# Altium PCB Fingerprint_Mechanism_PCB_V1.2.PcbDoc
Units mil, origin at the board's own origin, x right, y up, seen from the top; angles counter-clockwise.
Board outline 1800 x 4000 mil, 2 copper layers (Top Layer, Bottom Layer); 32 components, 20 nets, 114 pads, 0 vias.
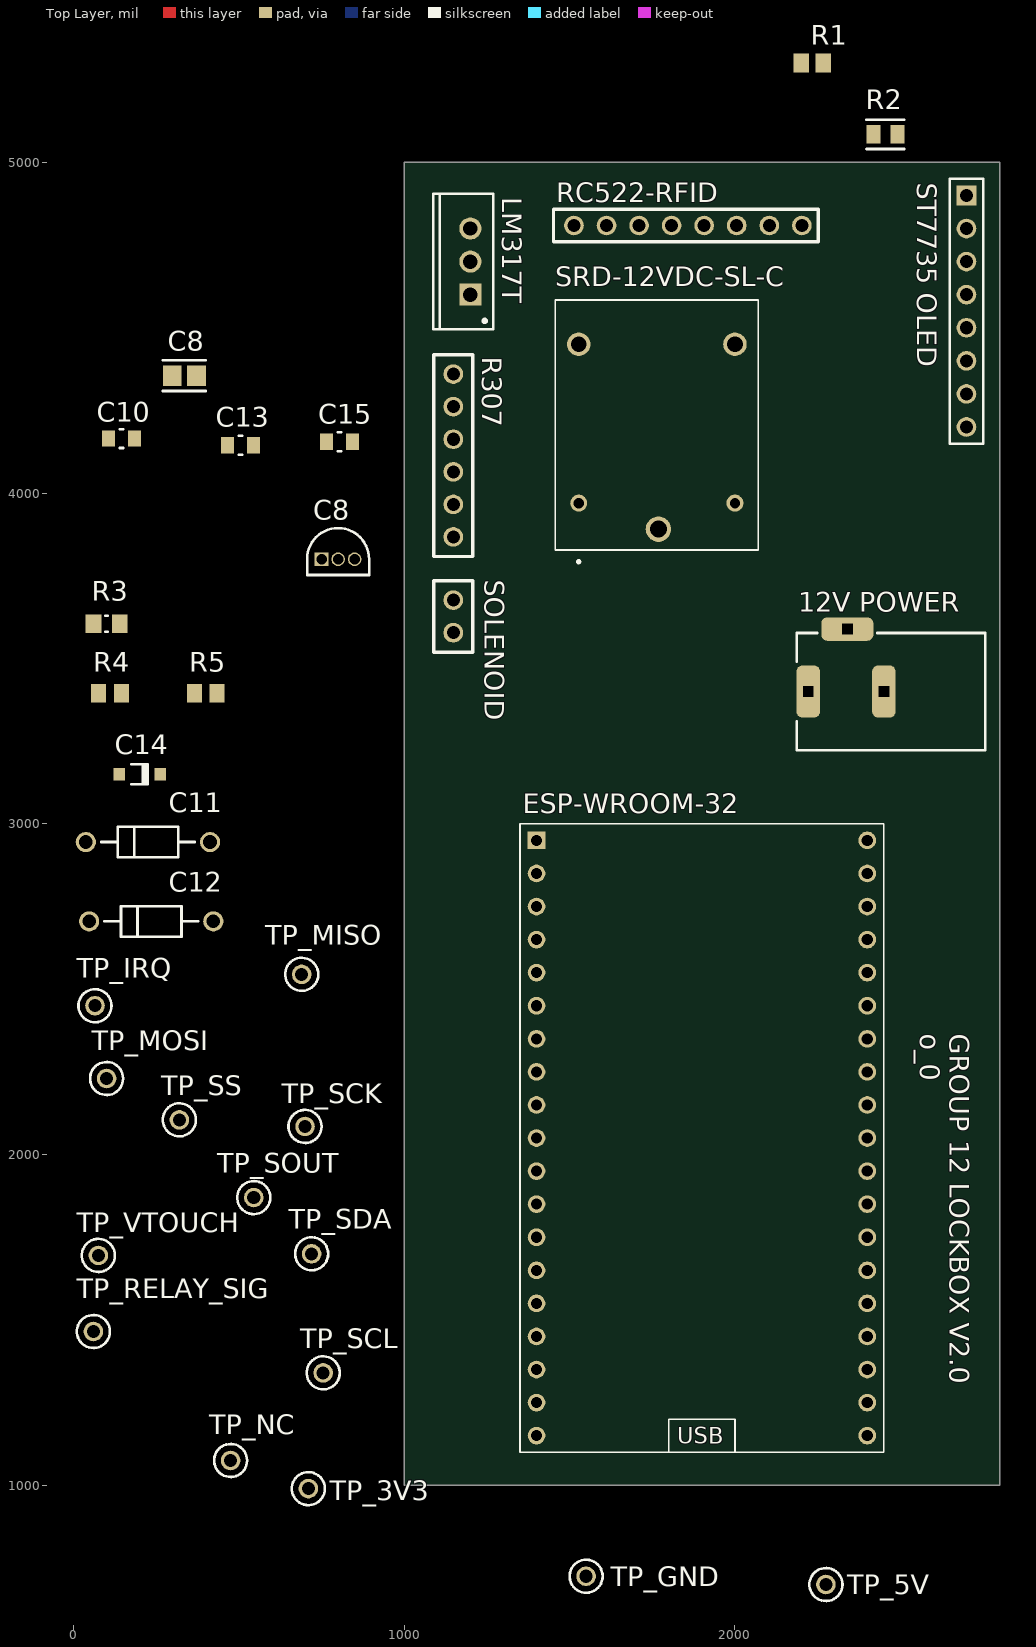
[diagram p0: Top Layer view]
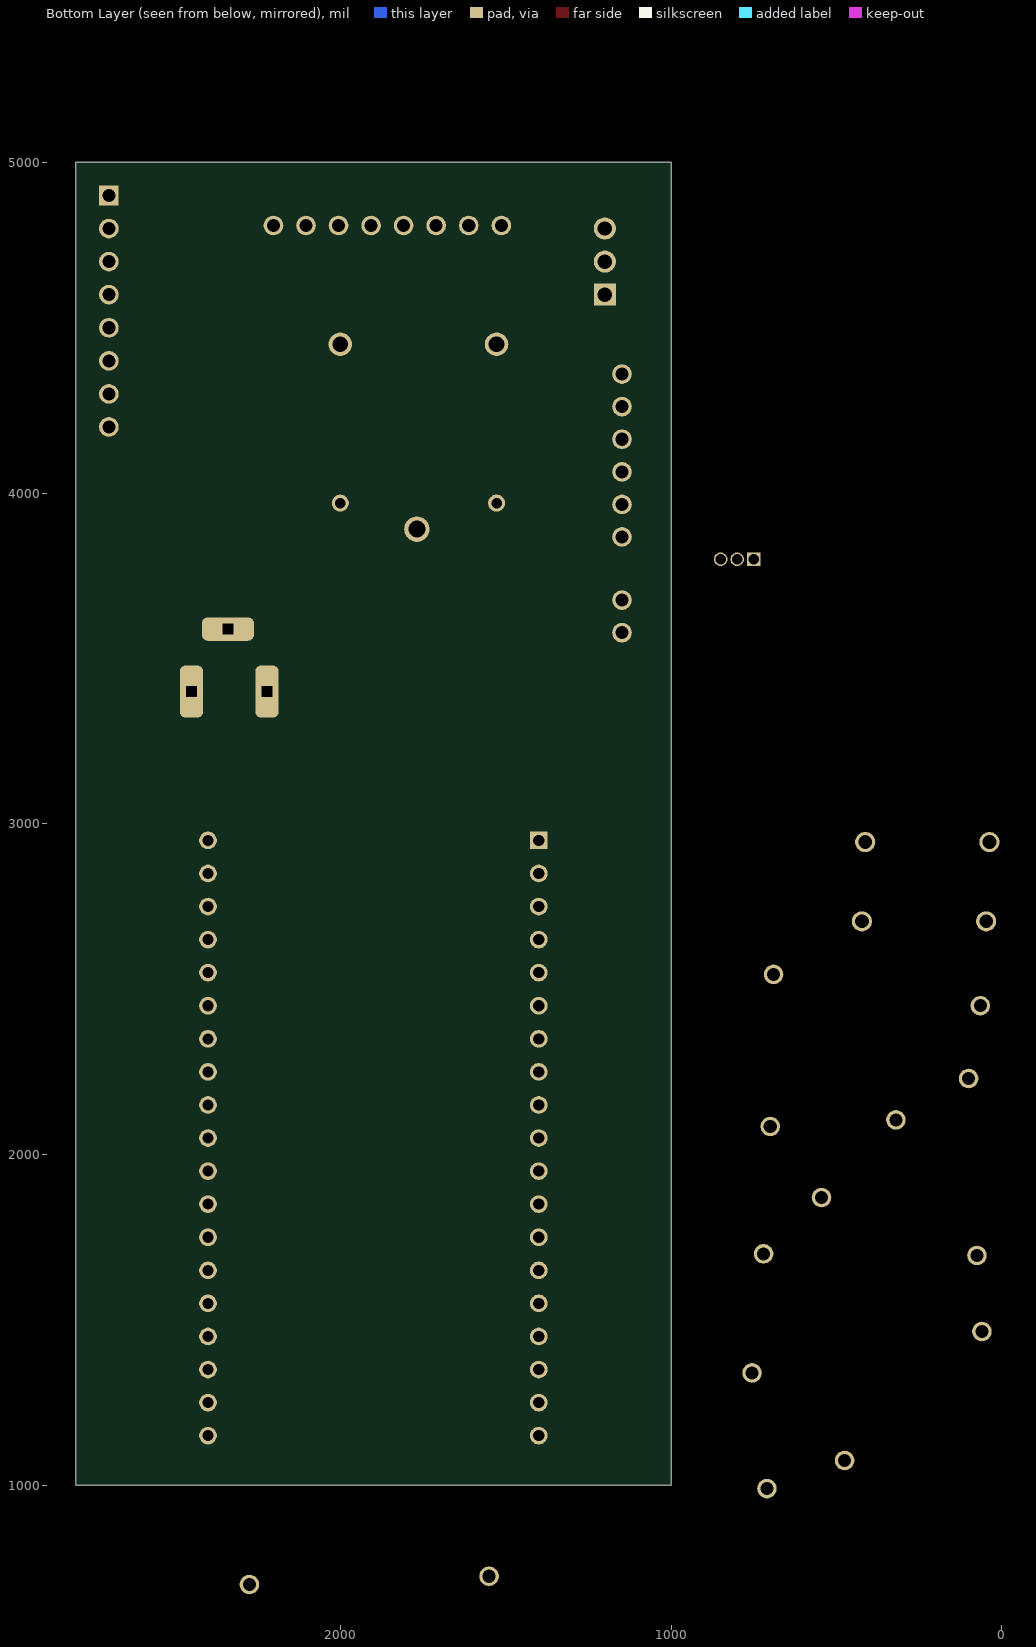
[diagram p1: Bottom Layer view, seen from below]

## Layer stack, top to bottom
Top Solder: solder mask 0.4, Solder Resist, Dk 3.5
Top Layer: signal copper 1.4
Dielectric 1: dielectric 12.6, FR-4, Dk 4.8
Bottom Layer: signal copper 1.4
Bottom Solder: solder mask 0.4, Solder Resist, Dk 3.5

## Board outline
1000,1000 1000,5000 2800,5000 2800,3200 2800,1000

## Design rules (kind name [scope] priority, off if disabled: settings)
Clearance Clearance_1 [All] p1: gap=10 ignorepadtopadclearanceinfootprint=FALSE
Clearance "Thermal Clearance for Traces" [All] p2: gap=10 ignorepadtopadclearanceinfootprint=FALSE
PolygonConnect [All] p1: connectstyle=Relief reliefconductorwidth=10 reliefentries=4 polygonreliefangle="90 Angle" airgapwidth=10
RoutingVias [All] p1: holewidth=28 width=50 viastyle="Through Hole" minholewidth=28 minwidth=50 maxholewidth=28 maxwidth=50
SolderMaskExpansion [All] p1: expansion=4 istentingtop=FALSE
SupplyNets "Schematic Supply Nets_1" [InNet('GND')] p1: voltage=0.000
SupplyNets "Schematic Supply Nets" [InNet('24V VCC')] p2: voltage=0.000
Width [All] p1: maxlimit=10 minlimit=10 preferedwidth=10
30 further rules are at their usual default settings.

## Components (designator, comment, footprint, x,y, rotation, side; value= is the part's Value field where it differs from the comment)
"12V POWER" "Comment" 694108301002 2471.65,3400 r90 top
C8 "Comment" FP-GRM21B-0_2-e0_2_0_7-IPC_A 335,4355 r0 top
C8 "Comment" FAIR-TO-92 750,3800 r0 top
C10 "Comment" FP-0805-L_2_01_0_2-W_1_25-MFG 145,4165 r0 top
C11 "Comment" ONSC-AXIAL_LEAD-2-59-10_P 225,2945 r0 top
C12 "Comment" ONSC-AXIAL_LEAD-2-59-10_P 235,2705 r0 top
C13 "Comment" FP-0805-L_2_01_0_2-W_1_25-MFG 505,4145 r0 top
C14 "Comment" DIOD-SOD123-2_V 200,3150 r0 top
C15 "Comment" FP-0805-L_2_01_0_2-W_1_25-MFG 804.37,4155 r0 top
ESP-WROOM-32 "Comment" ESP32-DEVKITC 1900,2050 r0 top
LM317T "LM317T Voltage Regulator (5V)" TO-220 1200,4700 r90 top (schematic designator C5)
R1 "Comment" RESC2013X60X40NL20T25 2233.46,5300 r0 top
R2 "Comment" FP-RN73R2A-IPC_B 2455,5085 r0 top
R3 "Comment" RESC2013X60X35ML10T20 100,3605 r0 top
R4 "Comment" RESC2013X70X40NL20T20 110,3395 r0 top
R5 "Comment" RESC2013X70X40NL20T20 400,3395 r0 top
SRD-12VDC-SL-C "Comment" RELAY_SRD-12VDC-SL-C 1763.78,4209.84 r90 top
"ST7735 OLED" "Comment" RFID-RC522 2700,4550 r270 top
TP_3V3 "Comment" KSTN-5003 710,990 r0 top
TP_5V "Comment" KSTN-5003 2275,700 r0 top
TP_GND "Comment" KSTN-5003 1550,725 r0 top
TP_IRQ "Comment" KSTN-5003 65,2450 r0 top
TP_MISO "Comment" KSTN-5003 690,2545 r0 top
TP_MOSI "Comment" KSTN-5003 100,2230 r0 top
TP_NC "Comment" KSTN-5003 475,1075 r0 top
TP_RELAY_SIG "Comment" KSTN-5003 60,1465 r0 top
TP_SCK "Comment" KSTN-5003 700,2085 r0 top
TP_SCL "Comment" KSTN-5003 755,1340 r0 top
TP_SDA "Comment" KSTN-5003 720,1700 r0 top
TP_SOUT "Comment" KSTN-5003 545,1870 r0 top
TP_SS "Comment" KSTN-5003 320,2105 r0 top
TP_VTOUCH "Comment" KSTN-5003 75,1695 r0 top

## Footprints (in the part's own frame and the unit in brackets; to place one, negate y for a bottom-side part, rotate by r counter-clockwise, add the part's x,y. Pads: shape width x height; smd on the part's side, far side on the other; paste and mask are expansions set on the pad)
694108301002 [mm] "DC Power Jack Right Angled(6.4)"
  rrect50% 4x1.8 hole 0.8 square: 1(0,6.35) 2(0,0.55)
  rrect50% 1.8x4 hole 0.8 square: 3(4.8,3.35)
  silkscreen extent -4.5,-7.25 4.5,7.25, body extent -4.5,-7.25 5,7.25, height 10.75
DIOD-SOD123-2_V [mm] "SOD123, 2-Leads, Body 2.7x1.55mm, Height 1.45mm"
  rect 0.9x0.95 smd: 1(-1.575,0) 2(1.575,0)
  silkscreen extent -0.64,-0.82 0.64,0.77, body extent -1.35,-0.77 1.35,0.77, height 1.45
ESP32-DEVKITC [mm]
  rect 1.358x1.358 / inner round 1.358 / far side rect 1.358x1.358 hole 0.85: 1(-12.7,22.86)
  round 1.358 hole 0.85: 2(-12.7,20.32) 3(-12.7,17.78) 4(-12.7,15.24) 5(-12.7,12.7) 6(-12.7,10.16) 7(-12.7,7.62) 8(-12.7,5.08) 9(-12.7,2.54) 10(-12.7,0) 11(-12.7,-2.54) 12(-12.7,-5.08) 13(-12.7,-7.62) 14(-12.7,-10.16) 15(-12.7,-12.7) 16(-12.7,-15.24) 17(-12.7,-17.78) 18(-12.7,-20.32) 19(-12.7,-22.86) 20(12.7,-22.86) 21(12.7,-20.32) 22(12.7,-17.78) 23(12.7,-15.24) 24(12.7,-12.7) 25(12.7,-10.16) 26(12.7,-7.62) 27(12.7,-5.08) 28(12.7,-2.54) 29(12.7,0) 30(12.7,2.54) 31(12.7,5.08) 32(12.7,7.62) 33(12.7,10.16) 34(12.7,12.7) 35(12.7,15.24) 36(12.7,17.78) 37(12.7,20.32) 38(12.7,22.86)
  silkscreen extent -13.97,-24.13 13.97,24.13
FAIR-TO-92 [mm] "TO, 3-Leads, Body Dia 4.79mm, Pitch 1.27mm"
  rect 1.05x1.05 hole 0.8 mask+0.05: 1(0,0)
  round 1.05 hole 0.8 mask+0.05: 2(1.27,0) 3(2.54,0)
  silkscreen extent -1.11,-1.21 3.65,2.4, body extent -1.11,-1.21 3.65,2.4, height 5.33
FP-0805-L_2_01_0_2-W_1_25-MFG [mm]
  rect 1x1.25 smd paste+0 mask+0: 1(-1,0) 2(1,0)
  silkscreen extent -0.13,-0.72 0.13,0.72, body extent -1.6,-0.82 1.6,0.82, height 0.25
FP-GRM21B-0_2-e0_2_0_7-IPC_A [mil]
  rect 57.27x61.27 smd paste+0 mask+0: 1(-36.45,0) 2(36.45,0)
  silkscreen extent -65,-46 65,46, body extent -85,-50 85,50, height 10
FP-RN73R2A-IPC_B [mil]
  rect 41.54x57.33 smd paste+0 mask+0: 1(-36.44,0) 2(36.44,0)
  silkscreen extent -57,-44 57,44, body extent -67,-39 67,39, height 10
KSTN-5003 [mm] "Test Point, Through Hole, Dia 2.54mm"
  round 1.5 hole 1: 1(0,0)
  silkscreen extent -1.27,-1.27 1.27,1.27, body extent -1.27,-1.27 1.27,1.27, height 4.57
ONSC-AXIAL_LEAD-2-59-10_P [mm] "AXIAL, 2-Leads, Diameter 2.35mm"
  round 1.55 hole 1.05: 1(-4.77,0) 2(4.77,0)
  silkscreen extent -3.59,-1.17 3.59,1.17
RELAY_SRD-12VDC-SL-C [mm]
  round 1.308 hole 0.8: COIL1(-6.1,6) COIL2(-6.1,-6)
  round 1.95 hole 1.3: COM(-8.1,-0.12)
  round 1.8 hole 1.2: NC(6.1,6) NO(6.1,-6)
  silkscreen extent -10.7,-7.8 9.5,7.8
RESC2013X60X35ML10T20 [mm] "Chip Resistor, 2-Leads, Body 2.1x1.35mm, IPC Low Density"
  rect 1.2x1.45 smd: 1(-1,0) 2(1,0)
  silkscreen extent -0.1,-0.63 0.1,0.63, body extent -1.05,-0.68 1.05,0.67, height 0.6
RESC2013X60X40NL20T25 [mm] "Chip Resistor, 2-Leads, Body 2.00x1.25mm, IPC Medium Density"
  rect 1.2x1.45 smd: 1(-0.85,0) 2(0.85,0)
  body extent -1.1,-0.72 1.1,0.72, height 0.6
RESC2013X70X40NL20T20 [mm] "Chip Resistor, 2-Leads, Body 2.2x1.35mm, IPC Medium Density"
  rect 1.15x1.45 smd: 1(-0.875,0) 2(0.875,0)
  body extent -1.1,-0.72 1.1,0.72, height 0.7
RFID-RC522 [mm]
  rect 1.508x1.508 / inner round 1.508 / far side rect 1.508x1.508 hole 1: 1(-8.89,0)
  round 1.508 hole 1: 2(-6.35,0) 3(-3.81,0) 4(-1.27,0) 5(1.27,0) 6(3.81,0) 7(6.35,0) 8(8.89,0)
  silkscreen extent -10.19,-1.3 10.19,1.3
TO-220 [mm] "TO, Thru-Hole, Vertical, Heatsink Mounted; 3 In-Line Leads; Pitch 2.54 mm"
  rect 1.7x1.7 hole 1.1: 1(-2.54,0)
  round 1.7 hole 1.1: 2(0,0) 3(2.54,0)
  silkscreen extent -5.2,-1.75 5.2,2.85, body extent -5.25,-1.8 5.25,2.9, height 19.7

## Part data
LM317T: library part CMP-0244-00444-1, "1.5A, 1.2V to 37V Adjustable Voltage Regulator, 3-Pin TO-220", ComponentLink1Description="Manufacturer URL", ComponentLink1URL=http://www.st.com, ComponentLink2Description=Datasheet, ComponentLink2URL=http://www.st.com/internet/com/TECHNICAL_RESOURCES/TECHNICAL_LITERATURE/DATASHEET/CD00000455.pdf, ComponentLink3Description="Package Specification", ComponentLink3URL=http://www.st.com/internet/com/TECHNICAL_RESOURCES/TECHNICAL_LITERATURE/PACKAGE_INFORMATION/CD00004649.pdf, DatasheetVersion=1/11/2011, PackageDescription="TO, Thru-Hole, Vertical, Heatsink Mounted; 3 In-Line Leads; Pitch 2.54 mm", PackageReference=TO-220, PackageVersion=2011

## Free pads (board coordinates)
  round 59.37 hole 39.37: ""(1148.23,3577.87) ""(1148.23,3676.29) ""(1148.23,3867.59) ""(1148.23,3966.02) ""(1148.23,4064.44) ""(1148.23,4162.87) ""(1148.23,4261.29) ""(1148.23,4359.72) ""(1513.19,4809.18) ""(1611.62,4809.18) ""(1710.04,4809.18) ""(1808.47,4809.18) ""(1906.89,4809.18) ""(2005.32,4809.18) ""(2103.74,4809.18) ""(2202.17,4809.18)

## Nets (pads, with @x,y where several pads share a name; then routed paths per layer and width w, separated by ;. In a path a pad name is that pad's centre, name@x,y a point inside that pad or via, vN(x,y) a via of type N, cw(c..) or ccw(c..) an arc to the next point about the centre after c; other vN are vias at no path point)
"24V VCC": 
GND: 
NetC0_2: 
NetC0_13: 
NetC0_23: 
NetC0_24: 
NetC0_26: 
NetC0_29: 
NetC0_30: 
NetC0_31: 
NetC0_33: 
NetC0_34: 
NetC0_35: 
NetC0_37: 
NetC2_3: LM317T.2
NetC4_1: 
NetC4_2: 
NetC4_3: 
NetC5_1: LM317T.1
NetC5_3: LM317T.3
pads on no net: "12V POWER.1" "12V POWER.2" "12V POWER.3" "ST7735 OLED.1" "ST7735 OLED.2" "ST7735 OLED.3" "ST7735 OLED.4" "ST7735 OLED.5" "ST7735 OLED.6" "ST7735 OLED.7" "ST7735 OLED.8" C8.1 C8.2 C8.3 C10.1 C10.2 C11.1 C11.2 C12.1 C12.2 C13.1 C13.2 C14.1 C14.2 C15.1 C15.2 ESP-WROOM-32.1 ESP-WROOM-32.2 ESP-WROOM-32.3 ESP-WROOM-32.4 ESP-WROOM-32.5 ESP-WROOM-32.6 ESP-WROOM-32.7 ESP-WROOM-32.8 ESP-WROOM-32.9 ESP-WROOM-32.10 ESP-WROOM-32.11 ESP-WROOM-32.12 ESP-WROOM-32.13 ESP-WROOM-32.14 ESP-WROOM-32.15 ESP-WROOM-32.16 ESP-WROOM-32.17 ESP-WROOM-32.18 ESP-WROOM-32.19 ESP-WROOM-32.20 ESP-WROOM-32.21 ESP-WROOM-32.22 ESP-WROOM-32.23 ESP-WROOM-32.24 ESP-WROOM-32.25 ESP-WROOM-32.26 ESP-WROOM-32.27 ESP-WROOM-32.28 ESP-WROOM-32.29 ESP-WROOM-32.30 ESP-WROOM-32.31 ESP-WROOM-32.32 ESP-WROOM-32.33 ESP-WROOM-32.34 ESP-WROOM-32.35 ESP-WROOM-32.36 ESP-WROOM-32.37 ESP-WROOM-32.38 R1.1 R1.2 R2.1 R2.2 R3.1 R3.2 R4.1 R4.2 R5.1 R5.2 SRD-12VDC-SL-C.COIL1 SRD-12VDC-SL-C.COIL2 SRD-12VDC-SL-C.COM SRD-12VDC-SL-C.NC SRD-12VDC-SL-C.NO TP_3V3.1 TP_5V.1 TP_GND.1 TP_IRQ.1 TP_MISO.1 TP_MOSI.1 TP_NC.1 TP_RELAY_SIG.1 TP_SCK.1 TP_SCL.1 TP_SDA.1 TP_SOUT.1 TP_SS.1 TP_VTOUCH.1
copper on no net: | length 103.6
  Top Layer w10: 1503.75,4799.74 1513.19,4809.18 ; 1602.17,4799.74 1611.62,4809.18 ; 1906.89,4809.18 1916.34,4818.63 ; 1996.81,4786.38 2005.63,4795.2 2017.51,4795.2 2022.05,4799.74 2028.12,4799.74 ; 2094.3,4799.74 2103.74,4809.18 ; 2192.72,4799.74 2202.17,4809.18

## Silkscreen, mask and mechanical layers (free items; w line width, h text height)
Top Overlay:
  lines w10: 1089.17,3518.81 1089.17,3735.35 1207.28,3735.35 1207.28,3518.81 1089.17,3518.81 ; 1089.17,3808.54 1089.17,4418.77 1207.28,4418.77 1207.28,3808.54 1089.17,3808.54 ; 1451.42,4759.97 2251.38,4759.97 2251.38,4858.4 1451.42,4858.4 1451.42,4759.97
  text "RC522-RFID" at 1460,4880 h60
  text "R307" at 1236.43,4413.04 h60 r270
  text "SOLENOID" at 1243.05,3738.66 h60 r270
  text "o_0" at 2560,2365 h60 r270
  text "GROUP 12 LOCKBOX V2.0" at 2650,2365 h60 r270
Board Outline:
  the board outline again, w10

## Text inside footprints (layer, text, board x,y; h text height)
ESP-WROOM-32: Top Overlay "USB" at 1825,1125 h50